# Altium PCB Pallette v2.1.PcbDoc
Units mm, origin at the board's own origin, x right, y up, seen from the top; angles counter-clockwise.
Board outline 78.55 x 16 mm, 2 copper layers (Top Layer, Bottom Layer); 40 components, 24 nets, 186 pads, 118 vias.
Unrouted connection lines stored in the file: 13.
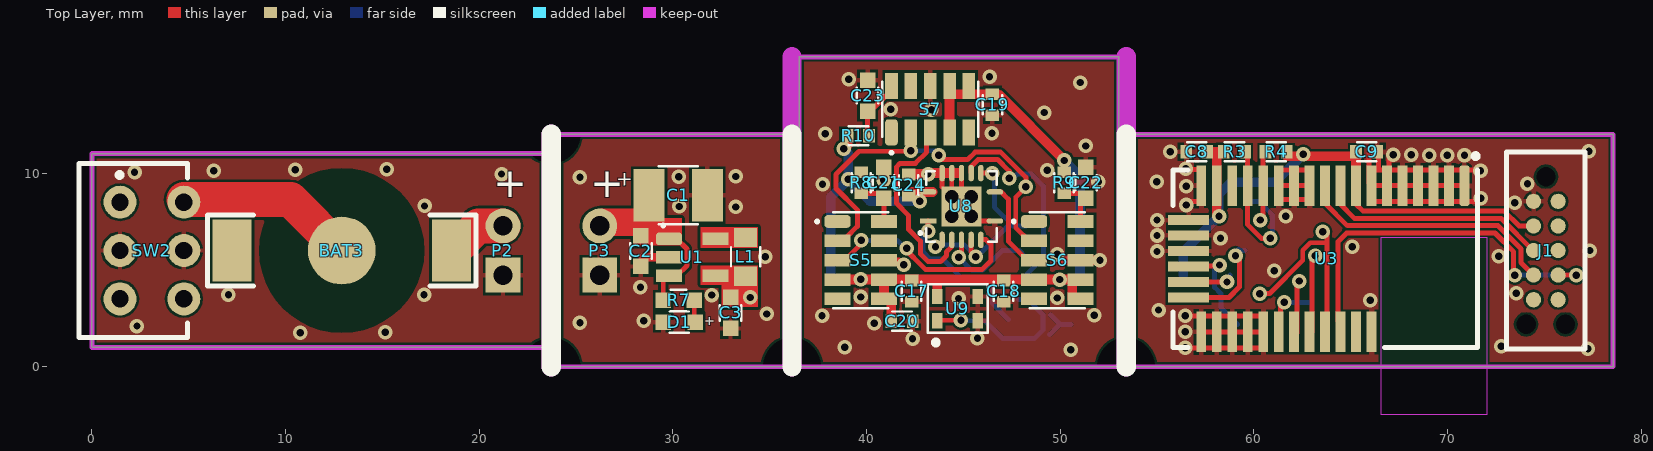
[diagram p0: Top Layer view]
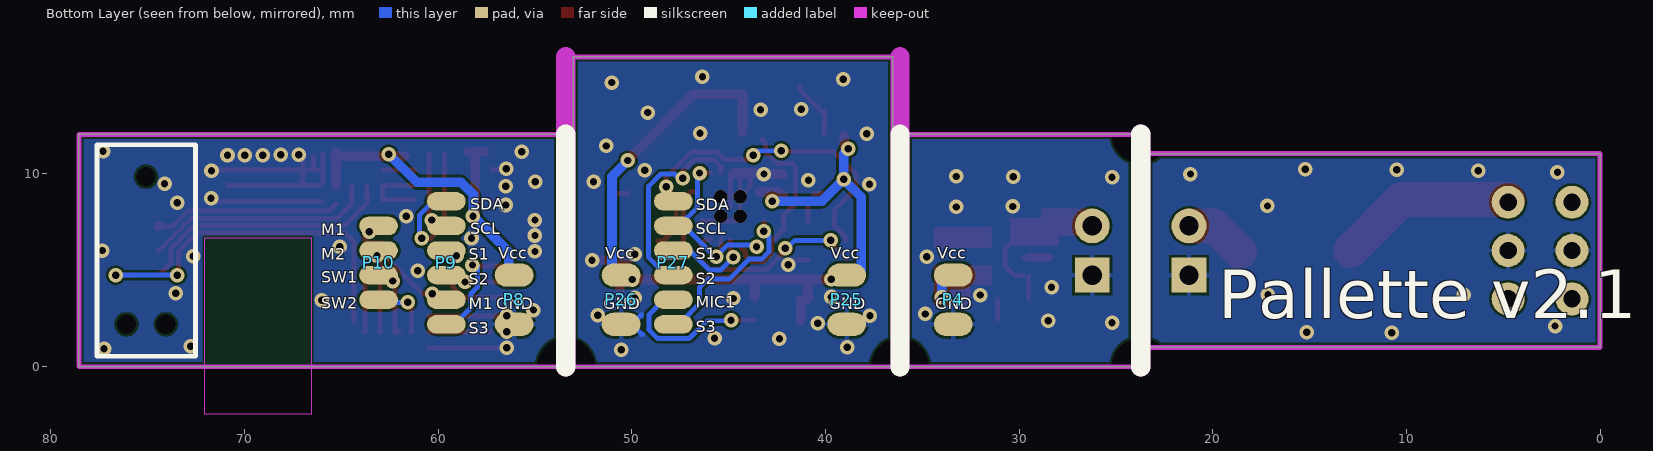
[diagram p1: Bottom Layer view, seen from below]

## Layer stack, top to bottom
Top Solder: solder mask 0.0102, Solder Resist, Dk 3.5
Top Layer: signal copper 0.0356
Dielectric 1: dielectric 0.32, FR-4, Dk 4.8
Bottom Layer: signal copper 0.0356
Bottom Solder: solder mask 0.0102, Solder Resist, Dk 3.5

## Board outline
0,1 0,11 23.725,11 23.725,12 36.533,12 36.533,16 53.025,16 53.025,12 78.55,12 78.55,0 23.725,0 23.725,1

## Design rules (kind name [scope] priority, off if disabled: settings)
Clearance Clearance_BAT [HasFootprintPad('BAT RETAINER 13', '2')] p1: gap=2.5
Clearance [All] p2: gap=0.125
ComponentClearance [All] p1: gap=0.1 collisioncheckmode=3 verticalgap=0.1 showdistances=FALSE
MinimumSolderMaskSliver [All] p1: minsoldermaskwidth=0.125
PolygonConnect PolygonConnect_Vias [IsVia] p1: connectstyle=Direct reliefconductorwidth=0.254 reliefentries=4 polygonreliefangle="90 Angle" airgapwidth=0.254
PolygonConnect PolygonConnect_BAT [HasFootprint('BAT RETAINER')] p2: connectstyle=Relief reliefconductorwidth=1.8 reliefentries=4 polygonreliefangle="90 Angle" airgapwidth=2.5
PolygonConnect [All] p3: connectstyle=Relief reliefconductorwidth=0.254 reliefentries=4 polygonreliefangle="90 Angle" airgapwidth=0.127
RoutingVias [All] p1: holewidth=0.127 width=0.4 viastyle="Through Hole" minholewidth=0.102 minwidth=0.381 maxholewidth=0.711 maxwidth=1.27
SolderMaskExpansion [All] p1: expansion=0.102
Width [All] p1: maxlimit=2.54 minlimit=0.1 preferedwidth=0.254
28 further rules are at their usual default settings.

## Components (designator, comment, footprint, x,y, rotation, side; value= is the part's Value field where it differs from the comment)
BAT3 "BAT RETAINER 13" "BAT RETAINER 13" 12.9,6 r0 top (schematic designator BAT1)
C1 "100uF" 1411 30.275,8.85 r0 top (schematic designator C2)
C2 "10uF" 0603 28.35,5.975 r90 top (schematic designator C1)
C3 "22uF" 0603 32.975,2.775 r90 top
C8 "100nF" 0402 57.05,11.1 r0 top (schematic designator C6)
C9 "100nF" 0402 65.825,11.1 r180 top (schematic designator C5)
C17 "100nF" 0402 42.325,3.9 r90 top
C18 "100nF" 0402 47.075,3.9 r90 top (schematic designator C7)
C19 "100nF" 0402 46.5,13.525 r90 top
C20 "100nF" 0402 41.825,2.35 r0 top (schematic designator C14)
C21 "22uF" 0603 40.875,9.5 r270 top
C22 "22uF" 0603 51.325,9.5 r270 top (schematic designator C19)
C23 "22uF" 0603 40.05,14 r270 top
C24 "100nF" 0402 42.175,9.375 r270 top
D1 "LED Indicator" LED 30.325,2.3 r180 top
J1 "HEADER PROG" TC2050-IDC-NL 75.075,6 r270 top
L1 "10uH" 0805 33.75,5.675 r270 top
P2 "HEADER PW TH" "PORT PW TH 2P" 21.225,6 r0 top (schematic designator P1)
P3 "HEADER PW TH" "PORT PW TH 2P" 26.225,6 r0 top
P4 "HEADER PW SMT" "PORT PW SMT 2P" 33.4,3.46 r180 bottom
P8 "HEADER PW SMT" "PORT PW SMT 2P" 56.075,3.46 r180 bottom
P9 "CONN 6P" "PORT CONN 6P" 59.575,5.365 r180 bottom
P10 "CONN 4P" "PORT CONN 4P" 63.075,5.365 r180 bottom
P25 "HEADER PW SMT" "PORT PW SMT 2P" 38.9,3.46 r180 bottom (schematic designator P11)
P26 "HEADER PW SMT" "PORT PW SMT 2P" 50.55,3.46 r180 bottom (schematic designator P11)
P27 "CONN 6P" "PORT CONN 6P" 47.85,5.365 r180 bottom
R3 "4.7K" 0402 59,11.1 r180 top
R4 "4.7K" 0402 61.15,11.1 r0 top
R7 "220R" 0603 30.3,3.425 r180 top
R8 "30R" 0402 39.725,9.5 r90 top
R9 "30R" 0402 50.2,9.5 r90 top (schematic designator R2)
R10 "30R" 0402 39.575,11.925 r180 top
S5 "Si1141-M01" SI1141-M01 39.7,5.5 r0 top
S6 "Si1141-M01" SI1141-M01 49.85,5.5 r0 top
S7 "Si1141-M01" SI1141-M01 43.285,13.3 r90 top
SW2 "SW SPDT SMT" "SW SPDT SMT" 3.1,6 r270 top
U1 "XC9265A221MR-G" SOT-25 31,5.65 r0 top
U3 "BLE113" BLE113-A 63.8,5.575 r270 top
U8 "SN74LVC125A" VQFN14 44.9,8.275 r0 top
U9 "MIC SPW0430HR5HB-B" MIC-4P 44.7,3 r90 top (schematic designator U5)

## Footprints (in the part's own frame and the unit in brackets; to place one, negate y for a bottom-side part, rotate by r counter-clockwise, add the part's x,y. Pads: shape width x height; smd on the part's side, far side on the other; paste and mask are expansions set on the pad)
0402 [mm] "Body 1.0x0.5mm, IPC High Density"
  rect 0.6x0.7 smd: 1(-0.55,0) 2(0.55,0)
  silkscreen extent -0.5,-0.5 0.5,0.5, body extent -0.55,-0.3 0.55,0.3, height 1.3
0603 [mm] "Body 1.6x0.8mm, IPC High Density"
  rect 0.8x0.8 smd: 1(-0.8,0) 2(0.8,0)
  silkscreen extent -0.4,-0.55 0.4,0.55, body extent -0.81,-0.46 0.81,0.46, height 1.3
0805 [mm] "Body 2.0x1.25mm, IPC High Density"
  rect 1x1.2 smd: 1(-1,0) 2(1,0)
  silkscreen extent -0.5,-0.75 0.5,0.75, body extent -1.02,-0.65 1.02,0.65, height 1.3
1411 [mm] "Body 3.5x2.8mm, IPC High Density"
  rect 1.6x2.7 smd: 1(-1.5,0) 2(1.5,0)
  silkscreen extent -1,-1.5 1,1.5, body extent -1.52,-1.4 1.52,1.4, height 1.3
"BAT RETAINER 13" [mm] "Body 13.36x12.07mm"
  rect 2.03x3.18 smd: 0(-5.665,0) 1(5.665,0)
  round 3.5 smd paste-5 mask+2.5: 2(0,0)
  silkscreen extent -6.93,-1.83 6.93,1.83, body extent -6.68,-3.15 6.68,4.21, height 5.95
BLE113-A [mm] "Body 15.725x9.15mm"
  rrect50% 2.1x0.5 smd: 1(-3.775,7.075)
  rect 2.1x0.5 smd: 2(-3.775,6.275) 3(-3.775,5.475) 4(-3.775,4.675) 5(-3.775,3.875) 6(-3.775,3.075) 7(-3.775,2.275) 8(-3.775,1.475) 9(-3.775,0.675) 10(-3.775,-0.125) 11(-3.775,-0.925) 12(-3.775,-1.725) 13(-3.775,-2.525) 14(-3.775,-3.325) 15(-3.775,-4.125) 16(-3.775,-4.925) 17(-3.775,-5.725) 18(-3.775,-6.525) 25(3.775,-6.525) 26(3.775,-5.725) 27(3.775,-4.925) 28(3.775,-4.125) 29(3.775,-3.325) 30(3.775,-2.525) 31(3.775,-1.725) 32(3.775,-0.925) 33(3.775,-0.125) 34(3.775,0.675) 35(3.775,1.475) 36(3.775,2.275)
  rect 0.5x2.1 smd: 19(-2,-7.175) 20(-1.2,-7.175) 21(-0.4,-7.175) 22(0.4,-7.175) 23(1.2,-7.175) 24(2,-7.175)
  Keep-Out Layer region: -1.075,2.75 8.025,2.75 8.025,8.25 -1.075,8.25
  silkscreen extent -5.43,-7.98 4.57,7.78, body extent -4.57,-7.97 4.57,7.75, height 1.9
LED [mm] "SMT LED; 2 Flat Leads"
  rect 0.8x0.8 smd: 1(-0.825,0) 2(0.825,0)
  silkscreen extent -0.5,-0.55 0.5,0.55, body extent -0.8,-0.4 0.8,0.4, height 0.65
MIC-4P [mm]
  rect 0.79x0.55 smd: 1(-0.625,1.045) 2(-0.625,-1.045) 3(0.625,-1.045) 4(0.625,1.045)
  silkscreen extent -1.87,-1.55 1.25,1.55, body extent -1.25,-1.55 1.25,1.55, height 1.25
"PORT CONN 4P" [mm] "Body 1.2x2mm"
  oval 2x0.95 smd paste-10: 1(0,1.905) 2(0,0.635) 3(0,-0.635) 4(0,-1.905)
"PORT CONN 6P" [mm] "Body 1.2x2mm"
  oval 2x0.95 smd paste-10: 1(0,3.175) 2(0,1.905) 3(0,0.635) 4(0,-0.635) 5(0,-1.905) 6(0,-3.175)
"PORT PW SMT 2P" [mm] "Body 1.2x2mm"
  oval 2x1.2 smd paste-10: 1(0,1.27) 2(0,-1.27)
"PORT PW TH 2P" [mm]
  round 1.8 hole 1: 1(0,1.27)
  rect 1.8x1.8 hole 1: 2(0,-1.27)
SI1141-M01 [mm] "Body 4.9x2.85mm"
  rrect50% 1.35x0.65 smd: 1(-1.2,2)
  rect 1.35x0.65 smd: 2(-1.2,1) 3(-1.2,0) 4(-1.2,-1) 5(-1.2,-2) 6(1.2,-2) 7(1.2,-1) 8(1.2,0) 9(1.2,1) 10(1.2,2)
  silkscreen extent -2.27,-2.48 1.43,2.47, body extent -1.43,-2.45 1.43,2.45, height 1.3
SOT-25 [mm] "Body 2.9x2.8mm"
  rrect50% 1.35x0.65 smd: 1(-1.2,0.95)
  rect 1.35x0.65 smd: 2(-1.2,0) 3(-1.2,-0.95) 4(1.2,-0.95) 5(1.2,0.95)
  silkscreen extent -1.52,1.63 -1.48,1.67, body extent -0.8,-1.45 0.8,1.45, height 1.3
"SW SPDT SMT" [mm] "Switch"
  round 1.7 hole 0.9: 1(-2.5,1.65) 1(-2.5,-1.65) 2(0,1.65) 2(0,-1.65) 3(2.5,1.65) 3(2.5,-1.65)
  silkscreen extent -4.5,-3.77 4.5,1.83, body extent -4.5,-3.77 4.5,1.83, height 3.22
TC2050-IDC-NL [mil] "Programming pads"
  round 0 hole 39 unplated: 0(-150,0) 0(150,-40) 0(150,40)
  round 31 smd paste-50: 1(-100,-25) 2(-50,-25) 3(0,-25) 4(50,-25) 5(100,-25) 6(100,25) 7(50,25) 8(0,25) 9(-50,25) 10(-100,25)
  silkscreen extent -200,-80 200,80
VQFN14 [mm] "Body 3.65x3.65mm"
  rect 2.05x2.05 smd: 0(0,0)
  rect 0.85x0.28 smd mask+0.05: 1(-1.725,-0.75)
  oval 0.28x0.85 smd mask+0.05: 2(-1,-1.725) 3(-0.5,-1.725) 4(0,-1.725) 5(0.5,-1.725) 6(1,-1.725) 9(1,1.725) 10(0.5,1.725) 11(0,1.725) 12(-0.5,1.725) 13(-1,1.725)
  oval 0.85x0.28 smd mask+0.05: 7(1.725,-0.75) 8(1.725,0.75) 14(-1.725,0.75)
  silkscreen extent -2.15,-1.83 1.82,1.83, body extent -1.83,-1.82 1.83,1.83, height 1

## Part data
BAT3: "RETAINER COIN CELL SMD 7.9MM"
C1: library part "Cap Pol 100uF", "CAP TANT POLY 100UF 8V 1411"
C2: library part "CAP 10uF", "CAP CER 10UF ±20% 10V X5R 0603"
C3 C21: library part "CAP 22uF", "CAP CER 22UF 6.3V X5R 0603"
C8 C9 C17 C18 C19 C20 C24: library part "Cap 100nF", "CAP CER 0.1UF 10V X5R 0402"
C22 C23: library part "Cap 22uF", "CAP CER 22UF 6.3V X5R 0603"
D1: "LED Red 630nm 2.2V Diffused White Lens 0603"
J1: "PADS PROGRAMMING"
L1: library part "IND 10uH", "FIXED IND 10UH 500MA 320 MOHM"
P2 P3: "PADS POWER"
P4 P8 P25 P26: "Connection Port"
P9 P27: library part "HEADER CONN 6P", "Connection Port"
P10: library part "HEADER CONN 4P", "Connection Port"
R3 R4: library part "Res 4.7K", "RES SMD 4.7K OHM 1% 1/16W 0402"
R7: library part "RES 220R", "RES SMD 220 OHM 1% 1/10W 0603"
R8 R9 R10: library part "Res 30R", "RES SMD 30 OHM 1% 1/16W 0402"
S5 S6 S7: "SENS IR PROXIMITY AMB LT 10QFN"
SW2: "SW Single-Pole Double-Throw SMT Right-Angle"
U1: library part "VR XC9265A221MR-G", "IC REG BUCK 2.2V 0.2A SYNC SOT25"
U3: library part "uC BLE113", "MODULE BT 4.0 BLE113 OTA"
U8: library part "BUFF SN74LVC125A", "IC BUS BUFF TRI-ST QD 14VQFN"
U9: "MIC MEMS ANALOG OMNI"

## Free pads (board coordinates)
  round 0 hole 3 unplated: 0(23.725,0) 0(23.725,12) 0(36.15,0) 0(53.4,0)

## Via types
v1: diameter 0.75, hole 0.38, Top Layer to Bottom Layer, tented both sides, 114 vias
v2: diameter 0.7, hole 0.7, Top Layer to Bottom Layer, tented bottom, 4 vias

## Nets (pads, with @x,y where several pads share a name; then routed paths per layer and width w, separated by ;. In a path a pad name is that pad's centre, name@x,y a point inside that pad or via, vN(x,y) a via of type N, cw(c..) or ccw(c..) an arc to the next point about the centre after c; other vN are vias at no path point)
+2V2: C3.2 C8.2 C9.2 C17.2 C18.2 C19.2 C20.1 C24.2 J1.2 L1.2 P4.1 P8.1 P25.1 P26.1 R3.2 R4.2 R8.2 R9.2 R10.2 S5.4 S5.6 S5.7 S6.4 S6.6 S6.7 S7.4 S7.6 S7.7 U1.4 U3.8 U3.17 U8.14 U9.4 | length 75.1
  Top Layer w0.254: U3.8@65.275,8.4 65.627,8.048 72.9,8.048 ; 72.91,8.048 73.688,7.27 J1.2
  Top Layer w0.5: S5.4@38.525,4.5 S5.7 S5.6 ; v1@39.025,11.45 R10.2 ; S5.7@40.925,4.5 C17.2@42.375,4.5 ; C20.1 S5.6@41.275,3.45 ; C24.2 42.375,9.025 U8.14@43.4,9.025 ; C17.2@42.41,4.49 42.4,4.5 46.126,4.5 S6.7@50.925,4.5 ; U9.4 43.655,4.495 ; S7.4 44.285,14.075 C19.2 46.8,14.075 v1@50.175,10.7 ; S6.6@50.625,3.5 S6.7@50.625,4.5 ; C8.2 R3.2 ; v1@58.075,7.875 U3.17@58.075,9.25 ; U3.17 58.075,11.05 ; R4.2@61.7,10.875 C9.2@65.275,10.875 ; U3.8 C9.2@65.275,10.875 ; C9.2 C9.2@65.275,10.875 ; C9.2@65.325,10.875 C9.2@65.275,10.875 ; J1.2@74.405,7.27 J1.2
  Bottom Layer w0.5: v1(34,3.575) P4.1@34,4.75 ; P25.1@38.15,4.73 38.15,8.77 v1(39.056,9.675) ; v1(38.825,11.25) 39.056,11.019 v1(39.056,9.675) ; v1(42.75,8.55) 40.181,8.55 v1(39.056,9.675) ; v1(50.2,10.65) 51.025,9.825 P26.1@51.025,4.7 ; P8.1@56.35,4.725 56.35,5.925 v1(58.2,7.775) ; v1@58.175,7.825 58.175,8.892 58.808,9.525 61.1,9.525 v1(62.55,10.975)
  other v1: 49.975,4.5 39.7,4.525
GND: C1.2 C2.1 C3.1 C8.1 C9.1 C17.1 C18.1 C19.1 C20.2 C21.1 C22.1 C23.1 C24.1 D1.2 J1.1 P2.2 P3.2 P4.2 P8.2 P25.2 P26.2 S5.8 S6.8 S7.8 SW2.2 U1.2 U3.1 U3.2 U3.3 U3.4 U3.5 U3.6 U3.7 U3.11 U3.12 U3.13 U3.18 U3.19 U3.20 U3.21 U3.25 U3.26 U3.27 U3.28 U3.29 U3.36 U8.0 U8.7 U8.11 U8.12 U8.13 U9.2 U9.3 | length 52.6
  Top Layer w0.254: U1.2 U1.2 ; S5.8 41.675,5.5 v1(41.915,5.26) ; v1(43.175,9.95) v1@43.225,10 ; U8.13@43.9,9.925 43.9,9.275 v2(44.4,8.775) ; U8.0@44.4,8.25 U8.12@44.4,9.975 ; U8.0@44.65,7.525 U8.7@46.375,7.525 ; U8.0 U8.11 ; v1@56.45,8.525 U3.18@57.225,8.525 ; v1@56.45,10.175 U3.18@57.225,10.175 ; v1@56.675,0.975 U3.29@60.5,0.975 ; 56.875,2.625 U3.29@60.5,2.625 ; U3.25 U3.26 U3.29 ; U3.13@61.202,10.15 U3.11@62.85,10.15 ; U3.13@61.227,8.625 U3.11@62.875,8.625 ; U3.13 U3.12 U3.11 U3.11@62.875,8.6 ; U3.7@65.95,9.475 65.95,11.021 ; U3.7@65.977,10.15 v1@71.575,10.15 ; U3.7@66.002,8.525 v1@71.475,8.525 ; U3.7 U3.6 U3.5 U3.4 U3.3 U3.2 U3.1 ; 66.425,10.15 C9.1@66.425,10.898 ; U3.6@66.975,9.427 v1@66.975,10.973
  Top Layer w0.45: 28.45,5.648 U1.2@29.525,5.648
  Top Layer w0.5: C24.1@42.2,9.95 v1(43.175,9.95) ; v1@43.225,10 U8.13 U8.12 U8.11@44.775,10 ; 50.2,5.5 S6.8 v1(52.05,5.5)
  Bottom Layer w0.254: 49.454,1.657 P26.2@49.937,2.14 ; 49.504,2.673 P26.2@49.987,2.19 ; P26.2@50.087,2.19 P26.2
  other v1: 50.55,0.875 77.25,0.925 56.45,0.975 38.875,1 72.775,1.05 42.375,1.45 45.725,1.475 10.75,1.75 15.15,1.775 56.45,1.8 2.325,2.1 40.4,2.25 25.2,2.275 28.5,2.375 37.7,2.625 56.45,2.625 51.75,2.65 34.85,2.725 55.075,2.925 66,3.425 44.75,3.525 49.85,3.55 39.7,3.6 32,3.7 7.05,3.725 17.15,3.725 73.55,3.8 28.325,4.1 61.05,4.95 34.775,5.675 72.65,5.7 49.85,5.8 55,5.95 77.35,6 65.075,6.2 58.275,6.625 55,6.775 55,7.575 61.65,7.775 33.25,8.25 30.325,8.275 17.175,8.3 56.5,8.35 73.475,8.475 71.725,8.7 56.5,9.325 37.725,9.425 74.125,9.45 51.975,9.55 54.975,9.55 40.875,9.625 25.2,9.775 30.3,9.8 33.25,9.825 21.15,9.95 2.2,10.05 6.3,10.125 71.7,10.125 49.325,10.15 10.5,10.175 15.225,10.2 56.475,10.225 69.05,10.925 69.975,10.925 70.875,10.925 67.2,10.95 68.125,10.95 55.675,11.1 77.3,11.125 51.325,11.4 37.875,12.025 46.475,12.05 49.175,13.125 43.35,13.275 41.25,13.3 51.025,14.675 39.075,14.85 46.35,14.975
  other v2: 44.4,7.775 45.4,7.775 45.4,8.775
MIC1: P9.5 P10.1 P27.5 U3.33 U9.1 | length 18.5
  Top Layer w0.254: U9.1 U9.1@43.655,2.424 ; U9.1@43.68,2.4 v1(44.875,2.4) ; v1(60.3,3.775) 60.803,3.775 62.523,5.495 62.523,6.01 62.915,6.402 63.775,6.402 ; U3.33@63.775,1.8 63.785,1.81 63.785,6.99 v1@63.775,7
  Bottom Layer w0.254: v1@44.875,2.375 46.105,2.375 47.017,1.463 48.676,1.463 49.102,1.889 49.102,2.698 48.34,3.46 P27.5
  other v1: 63.55,6.975
MIC2: P10.2 U3.32 | length 4
  Top Layer w0.254: U3.32@63,1.8 v1@63,5.8
  other v1: 63.158,5.725
NetBAT3_2: BAT3.2 SW2.1 | length 9.2
  Top Layer w1.8: SW2.1@4.75,8.63 10.253,8.63 BAT3.2@12.892,5.992
NetC21_2: C21.2 R8.1 S5.10 | length 2.1
  Top Layer w0.254: R8.1 C21.2@40.625,8.95 ; S5.10 C21.2@40.9,8.675
NetC22_2: C22.2 R9.1 S6.10 | length 2.3
  Top Layer w0.254: R9.1 C22.2@51.075,8.95 ; S6.10 C22.2@51.05,8.95
NetC23_2: C23.2 R10.1 S7.10 | length 3
  Top Layer w0.254: R10.1@40.05,12 C23.2 ; C23.2@40.05,13.05 S7.10@41.285,14.285 ; S7.10@41.285,14.435 S7.10
NetD1_1: D1.1 R7.1 | length 1.1
  Top Layer w0.254: D1.1@31.1,2.425 R7.1@31.1,3.5
NetL1_1: L1.1 U1.5
PROG_DC: J1.3 U3.9 | length 11.9
  Top Layer w0.254: U3.9 64.475,8.375 65.19,7.66 72.75,7.66 ; 72.762,7.66 J1.3@74.431,5.991 ; J1.3@74.397,6 J1.3
PROG_DD: J1.4 U3.10 | length 13.6
  Top Layer w0.254: U3.10 63.675,8.425 64.819,7.281 72.6,7.281 ; 72.605,7.281 73.794,6.092 73.794,5.376 J1.4
R\E\S\E\T\: J1.7 U3.34 | length 19.2
  Top Layer w0.254: U3.34@64.35,2.35 64.35,6.463 64.789,6.902 72.448,6.902 73.415,5.935 73.415,4.91 v1@73.65,4.675 ; J1.7 v1@76.645,4.73
  Bottom Layer w0.254: v1(73.475,4.725) v1(76.65,4.725)
S1_EN: P9.3 P27.3 U3.24 U8.4 | length 10.6
  Top Layer w0.254: v1@44.75,5.65 44.9,5.8 U8.4@44.9,6.575 ; U3.24 58.712,3.575 59.252,4.115 59.252,4.635 59.25,4.637 v1@59.25,5.725
  Bottom Layer w0.254: v1@44.75,5.575 v1@44.75,5.65 ; v1@44.75,5.72 v1@44.75,5.65 ; P27.3@48.225,5.65 47.875,6 47,6 45.992,4.992 45.408,4.992 v1@44.75,5.65 ; P9.3@59.1,5.825 59.2,5.925 P9.3@59.2,6 ; P9.3@59.1,6 P9.3@59.2,6 ; P9.3@59.2,6.075 P9.3@59.2,6 ; P9.3@59.55,6 P9.3@59.2,6
  other v1: 44.756,5.65 59.05,5.725
S1_SCL: S5.3 U8.6 | length 10.5
  Top Layer w0.254: S5.3@38.921,5.554 v1@39.796,6.429 ; v1@41.881,6.194 41.881,6.183 43.039,5.025 44.545,5.025 ; 44.546,5.023 45.066,5.023 ; 45.068,5.025 45.975,5.025 46.425,5.475 46.425,6.3 46.162,6.563 U8.6@45.912,6.563
  Bottom Layer w0.254: v1@39.7,6.725 39.9,6.525 41.575,6.525 41.975,6.125 v1(42.081,6.125)
  other v1: 39.725,6.525
S2_EN: P9.4 P27.4 U3.23 U8.10 | length 12.7
  Top Layer w0.254: U8.10@45.4,10.025 45.4,10.339 45.763,10.702 46.773,10.702 47.375,10.1 v1@47.375,9.55 ; U3.23 v1@58.4,4.375
  Bottom Layer w0.254: v1@47.375,9.55 47.775,9.95 48.5,9.95 49.125,9.325 49.125,5.63 P27.4@48.225,4.73 ; v1@58.4,4.375 P9.4@58.755,4.73
  other v1: 58.611,4.375 47.375,9.725
S2_SCL: S6.3 U8.8 | length 4.8
  Top Layer w0.254: U8.8@46.625,9.05 46.925,9.05 47.325,8.65 47.325,6.475 47.322,6.472 48.294,5.5 S6.3
S3_EN: P9.6 P27.6 U3.22 U8.1 | length 13.2
  Top Layer w0.254: U8.1 43.181,7.519 v1(43.181,7) ; U3.22@56.65,5.2 v1@58.15,5.2
  Bottom Layer w0.254: v1@43.206,7.075 42.923,6.792 42.923,5.927 43.297,5.553 43.947,5.553 44.975,4.525 46.075,4.525 46.497,4.103 46.497,3.25 46.507,3.25 P27.6@47.328,2.428 ; v1@57.975,5.225 57.975,4.099 58.3,3.774 58.3,3.05 P9.6@59.16,2.19
  other v1: 58.225,5.25
S3_SCL: S7.3 U8.3 | length 9.8
  Top Layer w0.254: 42.175,7.086 42.775,6.486 42.775,5.825 43.175,5.425 43.817,5.425 44.129,5.737 44.129,5.929 U8.3@44.4,6.2 ; 42.175,7.136 42.175,7.8 41.55,8.425 41.55,10.325 41.725,10.5 42.52,10.5 43.1,11.08 43.1,11.559 S7.3@43.285,11.744
SCL: P9.2 P27.2 R4.1 U3.14 U8.2 U8.5 U8.9 | length 13.2
  Top Layer w0.254: v1@45.4,5.937 U8.5@45.4,6.575 ; U8.9 v1(46.5,10) ; v1(60.325,7.575) 60.475,7.725 U3.14 R4.1@60.475,10.975
  Bottom Layer w0.254: v1@43.489,6.283 45.012,6.283 45.018,6.277 45.06,6.277 v1@45.427,5.91 ; v1@45.678,5.653 P27.2@47.55,7.525 ; v1@46.598,10 46.598,8.239 47.567,7.27 P27.2@48.225,7.27
  other v1: 45.631,5.675 43.556,6.2
SDA: P9.1 P27.1 R3.1 S5.2 S6.2 S7.2 U3.15 | length 27.4
  Top Layer w0.254: S5.2@38.95,6.5 38.95,6.675 39.525,7.25 39.525,8.1 38.423,9.202 38.423,9.938 39.61,11.125 v1@42.3,11.125 ; v1(43.725,10.925) 43.95,10.7 45.225,10.7 45.606,11.081 46.93,11.081 48.225,9.786 v1(48.225,9.3) ; v1@48.325,9.375 47.704,8.754 47.704,7.185 48.389,6.5 S6.2 ; R3.1@59.675,10.975 U3.15 59.675,7.338 60.388,6.625 v1@60.825,6.625
  Bottom Layer w0.254: v1(42.275,11.15) 43.5,11.15 v1(43.725,10.925) ; P9.1 P9.1@60.431,8.54 ; P9.1@60.431,8.365 60.952,7.844 60.952,6.727 v1(60.85,6.625)
SW1: P10.3 U3.31 | length 2.9
  Top Layer w0.254: U3.31@62.027,1.848 U3.31 ; U3.31@62.227,1.748 v1@62.227,4.575
  other v1: 62.35,4.425
SW2: P10.4 U3.30 | length 3
  Top Layer w0.254: U3.30@61.375,1.8 v1@61.375,3.4
  Bottom Layer w0.254: v1(61.575,3.325) P10.4@62.94,3.325
VBAT: BAT3.1 C1.1 C2.2 P2.1 P3.1 R7.2 U1.1 U1.3 | length 7.5
  Top Layer w0.254: R7.2@29.5,3.5 U1.3@29.5,4.675 ; U1.3 30.206,4.7 30.727,5.221 30.727,6.079 30.206,6.6 U1.1
  Top Layer w1.8: BAT3.1@18.62,5.945 19.95,7.275 P2.1@21.23,7.275 ; P2.1 P2.1@21.233,7.278
pads on no net: BAT3.0 J1.0 J1.5 J1.6 J1.8 J1.9 J1.10 S5.1 S5.5 S5.9 S6.1 S6.5 S6.9 S7.1 S7.5 S7.9 SW2.3 U3.16 U3.35

## Polygon pours and split planes (outlines as drawn)
GND on Bottom Layer "Bottom Layer-GND" (solid, remove dead copper, pour order 22): -5.175,18.25 193.786,18.25 193.786,-7.231 -5.175,-7.231
GND on Top Layer "Top Layer-No Net" (solid, remove dead copper, pour order 26): -5.183,22.179 -5.183,-3.747 194.343,-3.747 194.343,22.179 123.996,22.179

## Keep-outs
Keep-Out Layer:
  lines w0.254: 23.725,0 53.4,0 ; 23.725,1 0,1 0,11 23.725,11 ; 36.15,16 53.4,16 ; 53.4,11 53.4,12 ; 53.55,0 78.55,0 78.55,12 53.4,12 ; 23.725,11 23.725,12 ; 23.725,11 23.725,12 ; 23.725,12 36.15,12 ; 36.15,12 36.15,12 ; 53.4,12 53.4,12
  lines w1: 36.15,0 36.15,16 ; 53.4,0 53.4,16 ; 23.725,0 23.725,12 23.725,0

## Other copper
Top Layer:
  rectangle net +2V2: 32.5,3.075 34.4,4.425
  rectangle net VBAT: 26.25,6.75 28.85,8.175
  rectangle net +2V2: 31.425,4.225 34.4,5.225
  rectangle net NetL1_1: 31.425,6.125 34.4,7.225
  rectangle net VBAT: 27.95,7.325 29.575,7.6
  rectangle net VBAT: 27.95,6.25 30.475,7.675

## Silkscreen, mask and mechanical layers (free items; w line width, h text height)
Top Overlay:
  lines w1: 23.725,0 23.725,12 ; 36.15,0 36.15,12 ; 53.4,0 53.4,12
Bottom Overlay:
  lines w1: 23.725,0 23.725,12 ; 36.15,0 36.15,12 ; 53.4,0 53.4,12
  text "SDA" at 58.35,8.1 h0.6
  text "SDA" at 46.7,8.085 h0.6
  text "SCL" at 58.35,6.85 h0.6
  text "SCL" at 46.7,6.835 h0.6
  text "M1" at 66.025,6.8 h0.6
  text "Vcc" at 34.225,5.575 h0.6
  text "Vcc" at 39.725,5.575 h0.6
  text "S1" at 46.7,5.56 h0.6
  text "Vcc" at 51.375,5.575 h0.6
  text "Vcc" at 56.9,5.575 h0.6
  text "S1" at 58.408,5.525 h0.6
  text "M2" at 66.025,5.525 h0.6
  text "SW1" at 66.025,4.325 h0.6
  text "S2" at 46.7,4.26 h0.6
  text "S2" at 58.408,4.225 h0.6
  text "MIC1" at 46.7,3.05 h0.6
  text "SW2" at 66.025,3 h0.6
  text "GND" at 34.325,2.975 h0.6
  text "GND" at 39.825,2.975 h0.6
  text "GND" at 51.475,2.975 h0.6
  text "GND" at 57,2.975 h0.6
  text "M1" at 58.408,2.975 h0.6
  text "Pallette v2.1" at 19.725,2.5 h2.5
  text "S3" at 46.7,1.775 h0.6
  text "S3" at 58.408,1.705 h0.6
Board Outline:
  lines w0.254: 0,1 23.725,1 23.725,0 53.55,0 78.55,0 78.55,12 53.025,12 53.025,16 36.533,16 36.533,12 23.725,12 23.725,11 0,11 0,1
PCB Notes:
  text "V-scores on Mechanical 30 Layer" at -0.379,32.838 h1.52
  text "0.014\" FR-370HR material / 1 oz. copper / White mask / Black silkscreen" at -0.45,21.15 h1.52
Drill Drawing:
  text ".Legend" at -0.35,-47.525 h1.52
V-Score:
  lines w0.5: 23.725,0 23.725,12 ; 36.15,0 36.15,12 ; 53.4,0 53.4,12

## Text inside footprints (layer, text, board x,y; h text height)
C1: Top Overlay "+" at 27.075,9.35 h0.76
D1: Top Overlay "+" at 32.175,2.55 h0.5 r180
P2: Top Overlay "+" at 20.725,8.75 h1.52
P3: Top Overlay "+" at 25.725,8.75 h1.52